# Altium PCB Rugzak.PcbDoc
Units mil, origin at the board's own origin, x right, y up, seen from the top; angles counter-clockwise.
Board outline 3094 x 2704 mil, 2 copper layers (Top Layer, Bottom Layer); 41 components, 23 nets, 97 pads, 0 vias.
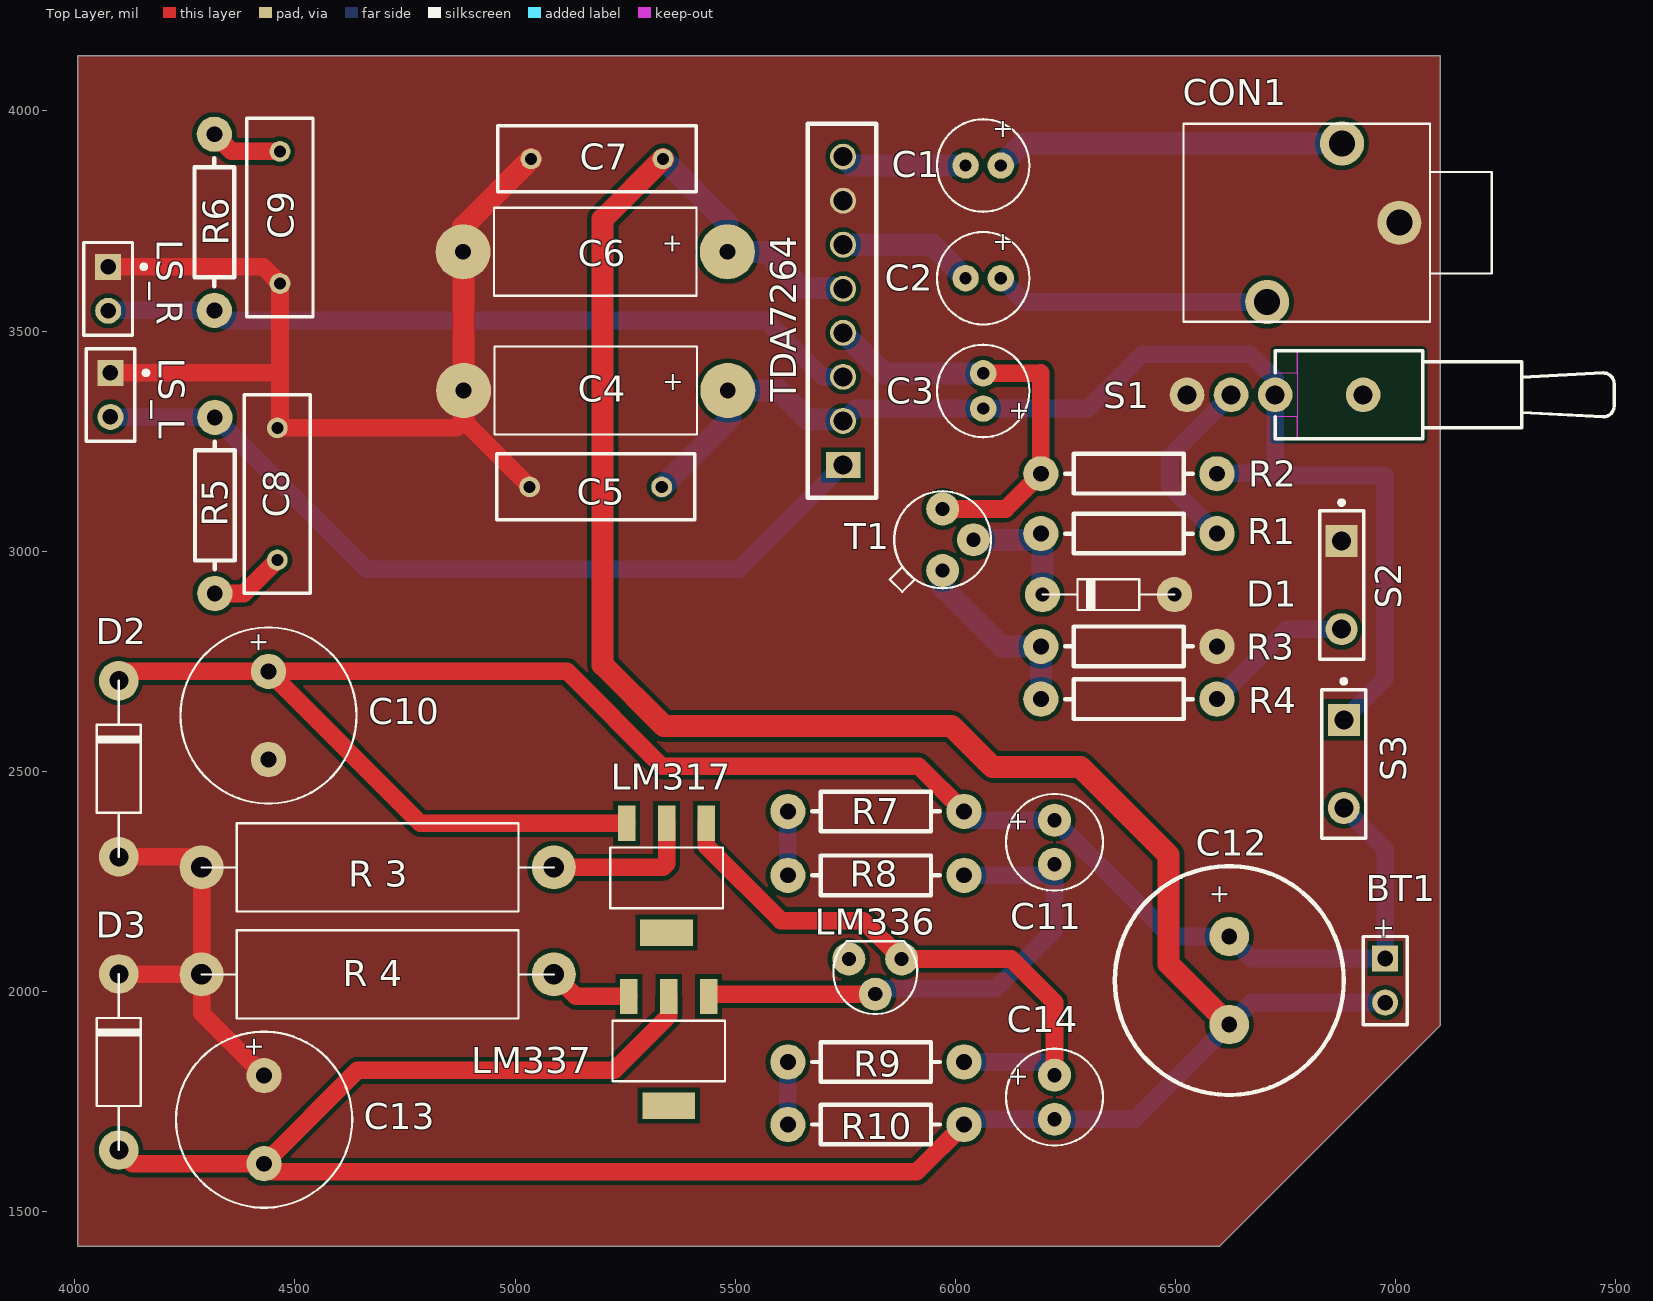
[diagram p0: Top Layer view]
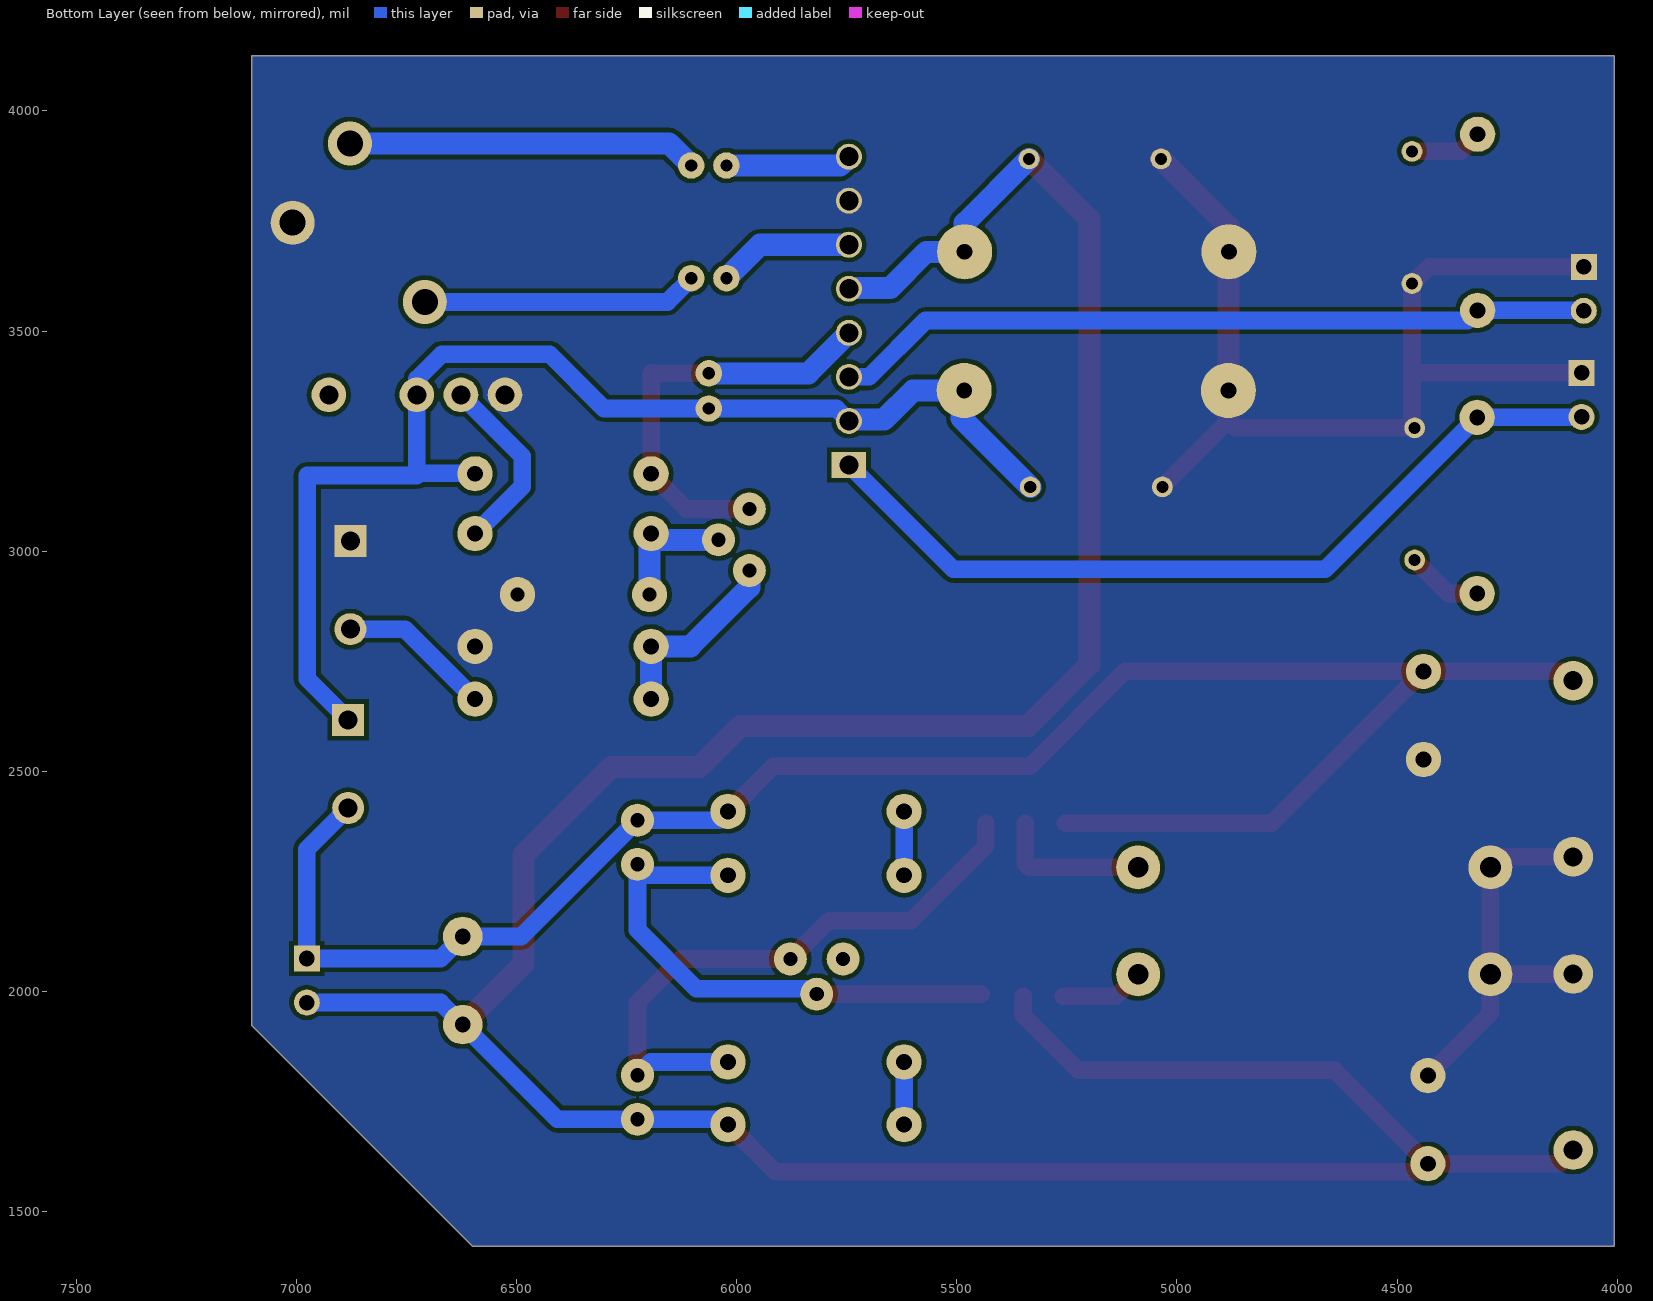
[diagram p1: Bottom Layer view, seen from below]

## Layer stack, top to bottom
Top Layer: signal copper 1.4
Dielectric: dielectric 12.6, FR-4, Dk 4.8
Bottom Layer: signal copper 1.4

## Board outline
4007,4125 7101,4125 7101,1923 6615,1437 6599,1421 4007,1421

## Design rules (kind name [scope] priority, off if disabled: settings)
Clearance [All] p1: gap=10
PolygonConnect PolygonConnect_1 [All] p1: connectstyle=Direct reliefconductorwidth=10 reliefentries=4 polygonreliefangle="90 Angle" airgapwidth=10
PolygonConnect [All] p2: connectstyle=Relief reliefconductorwidth=10 reliefentries=4 polygonreliefangle="90 Angle" airgapwidth=10
RoomDefinition Sheet1 [InComponentClass('Sheet1')] p1: confinementstyle=ConfineIn formatcopy=TRUE lockcomponents=FALSE outline 3818,1005 7584,1005 7584,4214 3818,4214
RoutingVias [All] p1: holewidth=28 width=50 viastyle="Through Hole" minholewidth=28 minwidth=50 maxholewidth=28 maxwidth=50
SolderMaskExpansion [All] p1: expansion=4
Width [All] p1: maxlimit=80 minlimit=40 preferedwidth=50
28 further rules are at their usual default settings.

## Components (designator, comment, footprint, x,y, rotation, side; value= is the part's Value field where it differs from the comment)
BT1 "Battery" BAT-2 6976,2025 r270 top
C1 "1uF" "cap 83 pol (D.21/.08/60/28)" 6063,3876 r180 top
C2 "1uF" "cap 83 pol (D.21/.08/60/28)" 6063,3620 r180 top
C3 "1uF" "cap 83 pol (D.21/.08/60/28)" 6063,3364 r90 top
C4 "Cap" "cap 48 pol (.46/.2/.6/125/36)" 5183,3365 r180 top
C5 "100nF" RAD-0.3 5183,3146 r0 top
C6 "Cap" "cap 48 pol (.46/.2/.6/125/36)" 5182,3680 r180 top
C7 "Cap" RAD-0.3 5186,3891 r0 top
C8 "Cap" RAD-0.3 4460,3130 r270 top
C9 "Cap" RAD-0.3 4466,3758 r90 top
C10 "CECR1000uF/25V" "cap 64 pol (D.4/.2/80/36)" 4440,2627 r270 top
C11 "CECR22uF/35V" "cap 62 pol (D.22/.1/75/32)" 6225,2339 r270 top
C12 "CECR470uF/63V" "cap 63 pol (D.52/.2/90/36)" 6622,2025 r270 top
C13 "CECR1000uF/25V" "cap 64 pol (D.4/.2/80/36)" 4430,1709 r270 top
C14 "CECR22uF/35V" "cap 62 pol (D.22/.1/75/32)" 6225,1760 r270 top
CON1 "CON JACKSOCK3.5/MJ-352W-0" "con jacksock 3.5mm (MJ-352W-0)" 6808,3746 r0 top
D1 "BZX79C5V1" DO-35 6297.5,2901.5 r180 top
D2 "1N4002" DO-41 4100,2506 r90 top
D3 "1N4002" DO-41 4100,1840 r90 top
LM317 "LM1117MPX-3.3" "smd SOT-223" 5344,2258 r180 top
LM336 "LM78L05ACZ" TO-92 5818,2074 r90 top
LM337 "LM1117MPX-3.3" "smd SOT-223" 5349,1865 r180 top
LS_L "Speaker" PIN2 4081,3405 r270 top
LS_R "Speaker" PIN2 4076,3646 r270 top
R1 "Res" "ws 0.6W H" 6394,3040 r0 top
R2 "Res" "ws 0.6W H" 6394,3176 r0 top
R3 "Res" "ws 0.6W H" 6394,2784 r180 top
R4 "Res" "ws 0.6W H" 6394,2664 r180 top
R5 "Res" "ws 0.6W H" 4318,3104 r270 top
R6 "Res" "ws 0.6W H" 4317,3747 r270 top
R7 "2K2" "ws 0.6W H" 5819.5,2409 r180 top
R8 "120R" "ws 0.6W H" 5819.5,2264 r180 top
R9 "2K2" "ws 0.6W H" 5819.5,1840 r180 top
R10 "120R" "ws 0.6W H" 5819.5,1698 r180 top
"R 3" "1R1/2.5W" "ws 2.5W H" 4688,2282 r0 top
"R 4" "1R1/2.5W" "ws 2.5W H" 4688,2039 r180 top
S1 "SW-SPDT" TL36WW15050 6726,3355 r0 top
S2 "SW-PB" SPST-2 6877,2923 r270 top
S3 "SW-SPST" SPST-2 6882,2517 r270 top
T1 "BC107" TO-18 5971,3026 r180 top
TDA7264 "TDA7264 stereo audio amplifier" MultiWatt8 5745,3196 r90 top

## Footprints (in the part's own frame and the unit in brackets; to place one, negate y for a bottom-side part, rotate by r counter-clockwise, add the part's x,y. Pads: shape width x height; smd on the part's side, far side on the other; paste and mask are expansions set on the pad)
BAT-2 [mm] "Battery; 2 Leads"
  rect 1.5x1.5 hole 0.9: 1(-1.27,0)
  round 1.5 hole 0.9: 2(1.27,0)
  silkscreen extent -2.54,-1.27 2.54,1.27
"cap 48 pol (.46/.2/.6/125/36)" [mil]
  round 125 / inner round 60 / far side round 125 hole 36 paste+0 mask+0: 1(-300,0) 2(300,0)
  silkscreen extent -230,-100 230,100
"cap 62 pol (D.22/.1/75/32)" [mil]
  round 75 / inner round 60 / far side round 75 hole 32 paste+0 mask+0: 1(-50,0) 2(50,0)
  silkscreen extent -110,-110 110,110
"cap 63 pol (D.52/.2/90/36)" [mil]
  round 90 / inner round 60 / far side round 90 hole 36 paste+0 mask+0: 1(-100,0) 2(100,0)
  silkscreen extent -260,-260 260,260
"cap 64 pol (D.4/.2/80/36)" [mil]
  round 80 / inner round 60 / far side round 80 hole 36 paste+0 mask+0: 1(-100,0) 2(100,0)
  silkscreen extent -200,-200 200,200
"cap 83 pol (D.21/.08/60/28)" [mil]
  round 60 hole 28 paste+0 mask+0: 1(-40,0) 2(40,0)
  silkscreen extent -105,-105 105,105
"con jacksock 3.5mm (MJ-352W-0)" [mil]
  round 100 / inner round 60 / far side round 100 hole 59 paste+0 mask+0: 1(200,0) 2(70,180) 3(-100,-180)
  silkscreen extent -290,-225 410,225
DO-35 [mil]
  round 80 / inner round 60 / far side round 80 hole 32 paste+0 mask+0: 1(-200,0) 2(100,0)
  silkscreen extent -200,-35 100,35
DO-41 [mil]
  round 90 / inner round 60 / far side round 90 hole 43 paste+0 mask+0: 1(-200,0) 2(200,0)
  silkscreen extent -200,-50 200,50
MultiWatt8 [mm]
  rect 1.5x2 hole 1.1: 1(0,0)
  round 1.5 hole 1.1: 2(2.54,0) 3(5.08,0) 4(7.62,0) 5(10.16,0) 6(12.7,0) 7(15.24,0) 8(17.78,0)
  silkscreen extent -1.91,-1.91 19.68,2.03
PIN2 [mm] "Photosensitive Diode; 2 Leads"
  rect 1.5x1.5 hole 0.9: 1(0,0)
  round 1.5 hole 0.9: 2(2.54,0)
  silkscreen extent -1.4,-1.4 3.94,2.18
RAD-0.3 [mm] "Radial Cap, Thru-Hole; 2 Leads; 0.3 in Pin Spacing"
  round 1.2 hole 0.7: 1(-3.81,0) 2(3.81,0)
  silkscreen extent -5.71,-1.91 5.71,1.91
"smd SOT-223" [mil]
  rect 40x80 smd paste+0 mask+0: 1(-90.55,-124.02) 2(0,-124.02) 3(90.55,-124.02)
  rect 120x60 smd paste+0 mask+0: 4(0,124.02)
  silkscreen extent -128,-69 128,69
SPST-2 [mm] "Switch; 2 Leads"
  rect 1.85x1.85 hole 1.1: 1(-2.54,0)
  round 1.85 hole 1.1: 2(2.54,0)
  silkscreen extent -4.89,-1.27 4.28,1.27
TL36WW15050 [mm] "Switch; 4 Leads"
  round 2 hole 1.1: 1(0,0) 2(-2.54,0) 3(-5.08,0) M(5.08,0)
  Top Layer keep-out region: 1.27,2.54 1.27,-2.54 8.509,-2.54 8.509,2.54
  Top Layer keep-out region: 0,2.54 0,1.27 1.27,1.27 1.27,2.54
  Top Layer keep-out region: 0,-1.27 0,-2.54 1.27,-2.54 1.27,-1.27
  silkscreen extent 0,-2.54 19.56,2.54
TO-18 [mil]
  round 75 / inner round 60 / far side round 75 hole 32 paste+0 mask+0: 1(0,70) 2(-70,0) 3(0,-70)
  silkscreen extent -110,-110 120,118
TO-92 [mil]
  round 75 / inner round 60 / far side round 75 hole 32 paste+0 mask+0: 1(0,60) 2(-80,0) 3(0,-60)
  silkscreen extent -125,-95 40,95
"ws 0.6W H" [mil]
  round 80 hole 36: 1(-200,0) 2(200,0)
  silkscreen extent -145,-45 145,45
"ws 2.5W H" [mil]
  round 100 / inner round 60 / far side round 100 hole 47 paste+0 mask+0: 1(-400,0) 2(400,0)
  silkscreen extent -400,-100 400,100

## Part data
BT1: "Multicell Battery"
C1 C2 C3: library part CECR22uF/16V, "elektrolytische condensator radiaal 22uF/16V"
C4 C6: library part CECA0.47uF/63V, "elektrolytische condensator axiaal 0.47uF/63V"
C5: library part Cap, "Capacitor"
C7 C8 C9: "Capacitor"
C10 C13: "elektrolytische condensator radiaal 1000uF/25V"
C11 C14: "elektrolytische condensator radiaal 22uF/35V"
C12: "elektrolytische condensator radiaal 470uF/63V"
CON1: "audio socket 3.5mm stereo, MJ-352W-0"
D1: "zenerdiode 400mW/5V1"
D2 D3: "gelijkrichterdiode 100V/1A"
LM317 LM337: "low dropout linear regulator, 3.3V 800mA, SOT-223"
LM336: "spanningsregelaar, +5V, TO-92"
LS_L LS_R: "Loudspeaker"
R1 R2 R3 R4 R5 R6: library part 0R2, "weerstand 0R2 0.6W"
R7 R9: "weerstand 2K2 0.6W"
R8 R10: "weerstand 120R 0.6W"
"R 3" "R 4": "weerstand 1R1 2.5W"
S1: "SPDT Subminiature Toggle Switch, Right Angle Mounting, Vertical Actuation"
S2: "Switch"
S3: "Single-Pole, Single-Throw Switch"
T1: "NPN transistor"
TDA7264: "25 W + 25 W stereo amplifier with mute and standby"

## Nets (pads, with @x,y where several pads share a name; then routed paths per layer and width w, separated by ;. In a path a pad name is that pad's centre, name@x,y a point inside that pad or via, vN(x,y) a via of type N, cw(c..) or ccw(c..) an arc to the next point about the centre after c; other vN are vias at no path point)
+VS: BT1.1 C10.1 C11.1 C12.1 D2.2 LM317.3 R7.1 S3.2 | length 4492
  Top Layer w40: D2.2 4121,2727 C10.1 ; LM317.3 4784.98,2382.02 C10.1 ; R7.1 5916.5,2512 5333,2512 5118,2727 C10.1
  Bottom Layer w40: R7.1 6039.5,2389 C11.1 6489,2125 C12.1 6672,2075 BT1.1 6976,2323 S3.2
-VS: BT1.2 C6.1 C7.2 C12.2 C13.2 C14.2 D3.1 LM337.2 R10.1 TDA7264.5 | length 7821.7
  Top Layer w40: D3.1 4131,1609 C13.2 ; LM337.2 5349,1945 5225,1821 4642,1821 C13.2 ; R10.1 5912.5,1591 4448,1591 C13.2
  Top Layer w50: C7.2 5199,3754 5199,2742 5338,2603 5991,2603 6084,2510 6284,2510 6484,2310 6484,2063 C12.2 ; TDA7264.5@5743,3598 TDA7264.5
  Bottom Layer w40: R10.1@6031.5,1710 C14.2 6407,1710 C12.2 6672,1975 BT1.2
  Bottom Layer w50: C7.2 5482,3745 C6.1 5569,3680 5651,3598 TDA7264.5@5743,3598
GND: "R 3.1" "R 4.2" C4.2 C5.1 C6.2 C7.1 C8.1 C9.1 C10.2 C13.1 CON1.1 D1.1 D2.1 D3.2 LS_L.1 LS_R.1 R3.1 S1.3 S2.1 TDA7264.7 | length 3333.9
  Top Layer w30: C6.2 C6.2@4883,3679
  Top Layer w40: LS_R.1 4428,3646 C9.1 C8.1@4466,3280 ; LS_L.1 4462,3405 ; D3.2 4101,2039 4288,2039 ; D2.1 4264,2306 4288,2282 4288,2039 ; C13.1 4288,1951 4288,2039 ; C8.1 C8.1@4466,3280 ; C5.1 4883,3296 4867,3280 C8.1@4466,3280
  Top Layer w50: C6.2 4882,3737 C7.1 ; 4883,3296 C4.2 C6.2@4883,3679
NetC1_1: C1.1 CON1.2 | length 795.7
  Bottom Layer w50: C1.1 6153,3926 CON1.2
NetC1_2: C1.2 TDA7264.8 | length 286.3
  Bottom Layer w50: TDA7264.8 5765,3876 C1.2
NetC2_1: C2.1 CON1.3 | length 627.4
  Bottom Layer w40: C2.1 6157,3566 CON1.3
NetC2_2: C2.2 TDA7264.6 | length 309.5
  Bottom Layer w50: TDA7264.6 5947,3696 C2.2
NetC3_1: C3.1 C4.1 C5.2 R2.2 S1.1 S3.1 TDA7264.2 | length 2760.9
  Bottom Layer w40: TDA7264.2 5773,3324 C3.1 6301,3324 6424,3447 6670,3447 6726,3391 S1.1 6726,3177 R2.2@6595,3177 ; R2.2 R2.2@6598,3172 ; 6726,3172 6975,3172 6975,2710 S3.1
  Bottom Layer w50: C5.2 5489,3302 ; C4.1 5599,3365 5665,3299 TDA7264.2@5736,3299
NetC3_2: C3.2 R2.1 T1.3 TDA7264.4 | length 972.7
  Top Layer w40: T1.3 6114,3096 R2.1 6194,3405 6193,3404 C3.2
  Bottom Layer w50: TDA7264.4 5837,3404 C3.2
NetC8_2: C8.2 R5.2 | length 173.5
  Top Layer w40: R5.2 4384,2904 C8.2
NetC9_2: C9.2 R6.1 | length 165.2
  Top Layer w40: R6.1 4356,3908 C9.2
NetC11_2: C11.2 LM336.2 LM337.1 R8.1 | length 1205.8
  Top Layer w40: LM337.1@5444.54,1994 LM336.2
  Bottom Layer w40: LM336.2 5830.5,2006.5 6091.5,2006.5 6225,2140 C11.2 6200,2264 R8.1
NetC14_1: C14.1 LM317.1 LM336.3 R9.1 | length 1372.8
  Top Layer w40: LM317.1 5434.55,2330.45 5604,2161 5791,2161 LM336.3 6127,2074 6225,1976 C14.1
  Bottom Layer w40: R9.1 6195,1840 C14.1
NetD1_2: D1.2 R1.1 T1.2 | length 298.7
  Bottom Layer w50: T1.2 6180,3026 R1.1 6197.5,3036.5 D1.2
NetLM317_2: "R 3.2" LM317.2 | length 351.3
  Top Layer w40: 5088,2282 5336,2282 5344,2290 LM317.2
NetLM337_3: "R 4.1" LM337.3 | length 191.2
  Top Layer w40: 5088,2039 5137.98,1989.02 LM337.3
NetLS_L_2: LS_L.2 R5.1 TDA7264.1 | length 1904.1
  Bottom Layer w40: LS_L.2@4082,3304 R5.1 4663,2959 5508,2959 TDA7264.1
NetLS_R_2: LS_R.2 R6.2 TDA7264.3 | length 1732
  Bottom Layer w40: LS_R.2 4077,3547 R6.2 4340,3524 5571,3524 5699,3396 TDA7264.3
NetR1_2: R1.2 S1.2 | length 416.9
  Bottom Layer w40: R1.2 6487,3147 6487,3216 S1.2
NetR3_2: R3.2 R4.2 T1.1 | length 436.5
  Bottom Layer w50: T1.1 5971,2918 6105,2784 R3.2 R4.2
NetR4_1: R4.1 S2.2 | length 348.9
  Bottom Layer w40: R4.1 6753,2823 S2.2
NetR7_2: R7.2 R8.2 | length 145
  Bottom Layer w40: R8.2 R7.2
NetR9_2: R9.2 R10.2 | length 142
  Bottom Layer w40: R10.2 R9.2
pads on no net: LM317.4 LM336.1 LM337.4 S1.M

## Polygon pours and split planes (outlines as drawn)
GND on Top Layer "Top Layer-No Net" (solid, pour order 5): 4007,4125 7101,4125 7101,1923 6615,1437 6599,1421 4007,1421
GND on Bottom Layer "Top Layer-No Net1" (solid, pour order 7): 4007,4125 7101,4125 7101,1923 6615,1437 6599,1421 4007,1421

## Text inside footprints (layer, text, board x,y; h text height)
BT1: Top Overlay "+" at 6953.28,2169.49 h45.28 r270
C1: Top Overlay "+" at 6133,3976 h42 r180
C2: Top Overlay "+" at 6133,3720 h42 r180
C3: Top Overlay "+" at 6163,3294 h42 r90
C4: Top Overlay "+" at 5383,3402 h42 r180
C6: Top Overlay "+" at 5382,3717 h42 r180
C10: Top Overlay "+" at 4400,2817 h42 r270
C11: Top Overlay "+" at 6125,2409 h42 r270
C12: Top Overlay "+" at 6582,2245 h42 r270
C13: Top Overlay "+" at 4390,1899 h42 r270
C14: Top Overlay "+" at 6125,1830 h42 r270